# Altium PCB Main_Board.PcbDoc (part 4 of 14)
Units mm, origin at the board's own origin, x right, y up, seen from the top; angles counter-clockwise.
Board outline 142 x 82 mm, 10 copper layers (L1_Top, L2_PWR1, L3_Sig1, L4_GND1, L5_Sig2, L6_Sig3, L7_GND2, L8_Sig4, L9_GND3, L8_Bottom), stack 1.71 mm thick; 299 components, 328 nets, 2329 pads, 2908 vias.
Unrouted connection lines stored in the file: 2.
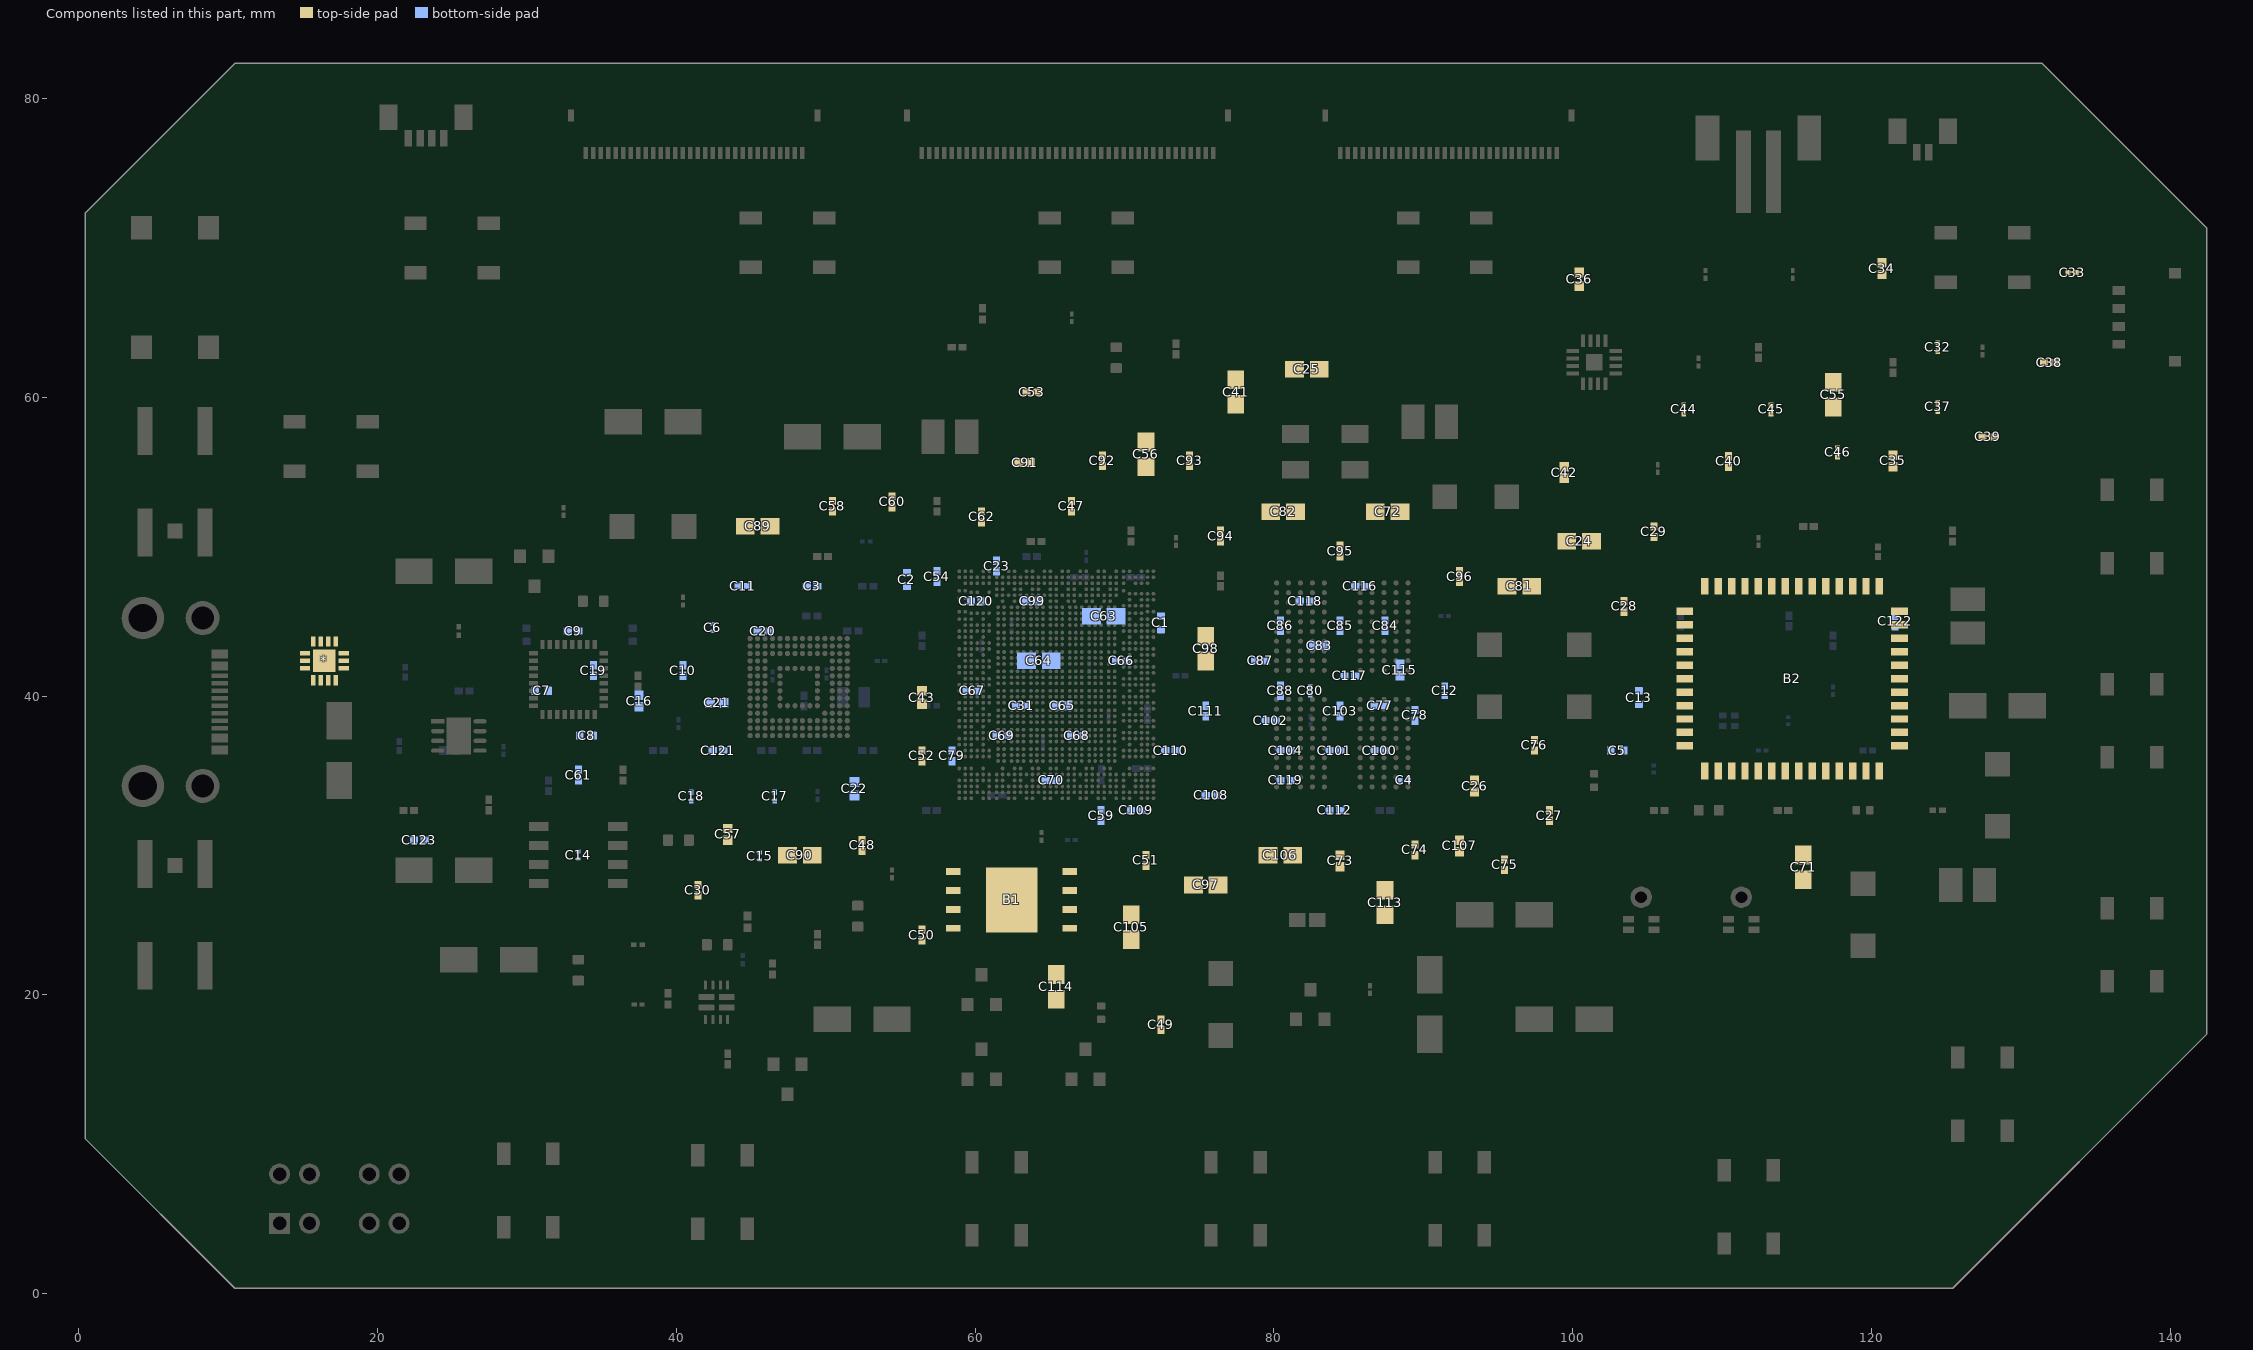
[diagram p12: the components of this part, seen from the top]

## Design rules (kind name [scope] priority, off if disabled: settings) (continued)
Clearance Clearance_2 [InNetClass('WIFI_BT_SIGNAL') And (ExistsOnLayer('L1_Top') Or ExistsOnLayer('L8_Bottom')) vs InNetClass('EMMC_HIGH_SPEED') And (ExistsOnLayer('L1_Top') Or ExistsOnLayer('L8_Bottom'))] p375: gap=0.02 ignorepadtopadclearanceinfootprint=FALSE except(0.254: Hole-Hole) sourcerule=512 cellrowname=WIFI_BT_SIGNAL cellrowtype=2 cellcolname=EMMC_HIGH_SPEED cellcoltype=2 outerlayers=TRUE
Clearance Clearance_3 [InNetClass('WIFI_BT_SIGNAL') vs InNetClass('EMMC_HIGH_SPEED')] p376: gap=0.254 ignorepadtopadclearanceinfootprint=FALSE sourcerule=512 cellrowname=WIFI_BT_SIGNAL cellrowtype=2 cellcolname=EMMC_HIGH_SPEED cellcoltype=2
Clearance Clearance_1 [InNetClass('WIFI_BT_SIGNAL') And (ExistsOnLayer('L3_Sig1') Or ExistsOnLayer('L5_Sig2') Or ExistsOnLayer('L6_Sig3') Or ExistsOnLayer('L8_Sig4')) vs InNetClass('I2S_PROTOCOL') And (ExistsOnLayer('L3_Sig1') Or ExistsOnLayer('L5_Sig2') Or ExistsOnLayer('L6_Sig3') Or ExistsOnLayer('L8_Sig4'))] p377: gap=0.02 ignorepadtopadclearanceinfootprint=FALSE except(0.254: Hole-Hole) sourcerule=512 cellrowname=WIFI_BT_SIGNAL cellrowtype=2 cellcolname=I2S_PROTOCOL cellcoltype=2 innerlayers=TRUE
Clearance Clearance_2 [InNetClass('WIFI_BT_SIGNAL') And (ExistsOnLayer('L1_Top') Or ExistsOnLayer('L8_Bottom')) vs InNetClass('I2S_PROTOCOL') And (ExistsOnLayer('L1_Top') Or ExistsOnLayer('L8_Bottom'))] p378: gap=0.02 ignorepadtopadclearanceinfootprint=FALSE except(0.254: Hole-Hole) sourcerule=512 cellrowname=WIFI_BT_SIGNAL cellrowtype=2 cellcolname=I2S_PROTOCOL cellcoltype=2 outerlayers=TRUE
Clearance Clearance_3 [InNetClass('WIFI_BT_SIGNAL') vs InNetClass('I2S_PROTOCOL')] p379: gap=0.254 ignorepadtopadclearanceinfootprint=FALSE sourcerule=512 cellrowname=WIFI_BT_SIGNAL cellrowtype=2 cellcolname=I2S_PROTOCOL cellcoltype=2
Clearance Clearance_1 [InNetClass('WIFI_BT_SIGNAL') And (ExistsOnLayer('L3_Sig1') Or ExistsOnLayer('L5_Sig2') Or ExistsOnLayer('L6_Sig3') Or ExistsOnLayer('L8_Sig4')) vs InNetClass('MCU_SIGNAL') And (ExistsOnLayer('L3_Sig1') Or ExistsOnLayer('L5_Sig2') Or ExistsOnLayer('L6_Sig3') Or ExistsOnLayer('L8_Sig4'))] p380: gap=0.02 ignorepadtopadclearanceinfootprint=FALSE except(0.254: Hole-Hole) sourcerule=512 cellrowname=WIFI_BT_SIGNAL cellrowtype=2 cellcolname=MCU_SIGNAL cellcoltype=2 innerlayers=TRUE
Clearance Clearance_2 [InNetClass('WIFI_BT_SIGNAL') And (ExistsOnLayer('L1_Top') Or ExistsOnLayer('L8_Bottom')) vs InNetClass('MCU_SIGNAL') And (ExistsOnLayer('L1_Top') Or ExistsOnLayer('L8_Bottom'))] p381: gap=0.02 ignorepadtopadclearanceinfootprint=FALSE except(0.254: Hole-Hole) sourcerule=512 cellrowname=WIFI_BT_SIGNAL cellrowtype=2 cellcolname=MCU_SIGNAL cellcoltype=2 outerlayers=TRUE
Clearance Clearance_3 [InNetClass('WIFI_BT_SIGNAL') vs InNetClass('MCU_SIGNAL')] p382: gap=0.254 ignorepadtopadclearanceinfootprint=FALSE sourcerule=512 cellrowname=WIFI_BT_SIGNAL cellrowtype=2 cellcolname=MCU_SIGNAL cellcoltype=2
Clearance Clearance_1 [InNetClass('WIFI_BT_SIGNAL') And (ExistsOnLayer('L3_Sig1') Or ExistsOnLayer('L5_Sig2') Or ExistsOnLayer('L6_Sig3') Or ExistsOnLayer('L8_Sig4')) vs InNetClass('MIPI_HIGH_SPEED') And (ExistsOnLayer('L3_Sig1') Or ExistsOnLayer('L5_Sig2') Or ExistsOnLayer('L6_Sig3') Or ExistsOnLayer('L8_Sig4'))] p383: gap=0.02 ignorepadtopadclearanceinfootprint=FALSE except(0.254: Hole-Hole) sourcerule=512 cellrowname=WIFI_BT_SIGNAL cellrowtype=2 cellcolname=MIPI_HIGH_SPEED cellcoltype=2 innerlayers=TRUE
Clearance Clearance_2 [InNetClass('WIFI_BT_SIGNAL') And (ExistsOnLayer('L1_Top') Or ExistsOnLayer('L8_Bottom')) vs InNetClass('MIPI_HIGH_SPEED') And (ExistsOnLayer('L1_Top') Or ExistsOnLayer('L8_Bottom'))] p384: gap=0.02 ignorepadtopadclearanceinfootprint=FALSE except(0.254: Hole-Hole) sourcerule=512 cellrowname=WIFI_BT_SIGNAL cellrowtype=2 cellcolname=MIPI_HIGH_SPEED cellcoltype=2 outerlayers=TRUE
Clearance Clearance_3 [InNetClass('WIFI_BT_SIGNAL') vs InNetClass('MIPI_HIGH_SPEED')] p385: gap=0.254 ignorepadtopadclearanceinfootprint=FALSE sourcerule=512 cellrowname=WIFI_BT_SIGNAL cellrowtype=2 cellcolname=MIPI_HIGH_SPEED cellcoltype=2
Clearance Clearance_1 [InNetClass('WIFI_BT_SIGNAL') And (ExistsOnLayer('L3_Sig1') Or ExistsOnLayer('L5_Sig2') Or ExistsOnLayer('L6_Sig3') Or ExistsOnLayer('L8_Sig4')) vs InNetClass('PERIPHERICS_SIGNALS') And (ExistsOnLayer('L3_Sig1') Or ExistsOnLayer('L5_Sig2') Or ExistsOnLayer('L6_Sig3') Or ExistsOnLayer('L8_Sig4'))] p386: gap=0.02 ignorepadtopadclearanceinfootprint=FALSE except(0.254: Hole-Hole) sourcerule=512 cellrowname=WIFI_BT_SIGNAL cellrowtype=2 cellcolname=PERIPHERICS_SIGNALS cellcoltype=2 innerlayers=TRUE
Clearance Clearance_2 [InNetClass('WIFI_BT_SIGNAL') And (ExistsOnLayer('L1_Top') Or ExistsOnLayer('L8_Bottom')) vs InNetClass('PERIPHERICS_SIGNALS') And (ExistsOnLayer('L1_Top') Or ExistsOnLayer('L8_Bottom'))] p387: gap=0.02 ignorepadtopadclearanceinfootprint=FALSE except(0.254: Hole-Hole) sourcerule=512 cellrowname=WIFI_BT_SIGNAL cellrowtype=2 cellcolname=PERIPHERICS_SIGNALS cellcoltype=2 outerlayers=TRUE
Clearance Clearance_3 [InNetClass('WIFI_BT_SIGNAL') vs InNetClass('PERIPHERICS_SIGNALS')] p388: gap=0.254 ignorepadtopadclearanceinfootprint=FALSE sourcerule=512 cellrowname=WIFI_BT_SIGNAL cellrowtype=2 cellcolname=PERIPHERICS_SIGNALS cellcoltype=2
Clearance Clearance_1 [InNetClass('WIFI_BT_SIGNAL') And (ExistsOnLayer('L3_Sig1') Or ExistsOnLayer('L5_Sig2') Or ExistsOnLayer('L6_Sig3') Or ExistsOnLayer('L8_Sig4')) vs InNetClass('POWER_SIGNALS') And (ExistsOnLayer('L3_Sig1') Or ExistsOnLayer('L5_Sig2') Or ExistsOnLayer('L6_Sig3') Or ExistsOnLayer('L8_Sig4'))] p389: gap=0.02 ignorepadtopadclearanceinfootprint=FALSE except(0.254: Hole-Hole) sourcerule=512 cellrowname=WIFI_BT_SIGNAL cellrowtype=2 cellcolname=POWER_SIGNALS cellcoltype=2 innerlayers=TRUE
Clearance Clearance_2 [InNetClass('WIFI_BT_SIGNAL') And (ExistsOnLayer('L1_Top') Or ExistsOnLayer('L8_Bottom')) vs InNetClass('POWER_SIGNALS') And (ExistsOnLayer('L1_Top') Or ExistsOnLayer('L8_Bottom'))] p390: gap=0.02 ignorepadtopadclearanceinfootprint=FALSE except(0.254: Hole-Hole) sourcerule=512 cellrowname=WIFI_BT_SIGNAL cellrowtype=2 cellcolname=POWER_SIGNALS cellcoltype=2 outerlayers=TRUE
Clearance Clearance_3 [InNetClass('WIFI_BT_SIGNAL') vs InNetClass('POWER_SIGNALS')] p391: gap=0.254 ignorepadtopadclearanceinfootprint=FALSE sourcerule=512 cellrowname=WIFI_BT_SIGNAL cellrowtype=2 cellcolname=POWER_SIGNALS cellcoltype=2
Clearance Clearance_1 [InNetClass('WIFI_BT_SIGNAL') And (ExistsOnLayer('L3_Sig1') Or ExistsOnLayer('L5_Sig2') Or ExistsOnLayer('L6_Sig3') Or ExistsOnLayer('L8_Sig4')) vs InNetClass('POWER_SUPPLY') And (ExistsOnLayer('L3_Sig1') Or ExistsOnLayer('L5_Sig2') Or ExistsOnLayer('L6_Sig3') Or ExistsOnLayer('L8_Sig4'))] p392: gap=0.02 ignorepadtopadclearanceinfootprint=FALSE except(0.254: Hole-Hole) sourcerule=512 cellrowname=WIFI_BT_SIGNAL cellrowtype=2 cellcolname=POWER_SUPPLY cellcoltype=2 innerlayers=TRUE
Clearance Clearance_2 [InNetClass('WIFI_BT_SIGNAL') And (ExistsOnLayer('L1_Top') Or ExistsOnLayer('L8_Bottom')) vs InNetClass('POWER_SUPPLY') And (ExistsOnLayer('L1_Top') Or ExistsOnLayer('L8_Bottom'))] p393: gap=0.02 ignorepadtopadclearanceinfootprint=FALSE except(0.254: Hole-Hole) sourcerule=512 cellrowname=WIFI_BT_SIGNAL cellrowtype=2 cellcolname=POWER_SUPPLY cellcoltype=2 outerlayers=TRUE
Clearance Clearance_3 [InNetClass('WIFI_BT_SIGNAL') vs InNetClass('POWER_SUPPLY')] p394: gap=0.254 ignorepadtopadclearanceinfootprint=FALSE sourcerule=512 cellrowname=WIFI_BT_SIGNAL cellrowtype=2 cellcolname=POWER_SUPPLY cellcoltype=2
Clearance Clearance_1 [InNetClass('WIFI_BT_SIGNAL') And (ExistsOnLayer('L3_Sig1') Or ExistsOnLayer('L5_Sig2') Or ExistsOnLayer('L6_Sig3') Or ExistsOnLayer('L8_Sig4')) vs InNetClass('PULL_DOWN_UP_RESISTENCE') And (ExistsOnLayer('L3_Sig1') Or ExistsOnLayer('L5_Sig2') Or ExistsOnLayer('L6_Sig3') Or ExistsOnLayer('L8_Sig4'))] p395: gap=0.02 ignorepadtopadclearanceinfootprint=FALSE except(0.254: Hole-Hole) sourcerule=512 cellrowname=WIFI_BT_SIGNAL cellrowtype=2 cellcolname=PULL_DOWN_UP_RESISTENCE cellcoltype=2 innerlayers=TRUE
Clearance Clearance_2 [InNetClass('WIFI_BT_SIGNAL') And (ExistsOnLayer('L1_Top') Or ExistsOnLayer('L8_Bottom')) vs InNetClass('PULL_DOWN_UP_RESISTENCE') And (ExistsOnLayer('L1_Top') Or ExistsOnLayer('L8_Bottom'))] p396: gap=0.02 ignorepadtopadclearanceinfootprint=FALSE except(0.254: Hole-Hole) sourcerule=512 cellrowname=WIFI_BT_SIGNAL cellrowtype=2 cellcolname=PULL_DOWN_UP_RESISTENCE cellcoltype=2 outerlayers=TRUE
Clearance Clearance_3 [InNetClass('WIFI_BT_SIGNAL') vs InNetClass('PULL_DOWN_UP_RESISTENCE')] p397: gap=0.254 ignorepadtopadclearanceinfootprint=FALSE sourcerule=512 cellrowname=WIFI_BT_SIGNAL cellrowtype=2 cellcolname=PULL_DOWN_UP_RESISTENCE cellcoltype=2
Clearance Clearance_1 [InNetClass('WIFI_BT_SIGNAL') And (ExistsOnLayer('L3_Sig1') Or ExistsOnLayer('L5_Sig2') Or ExistsOnLayer('L6_Sig3') Or ExistsOnLayer('L8_Sig4')) vs InNetClass('TYPEC_SIGNALS') And (ExistsOnLayer('L3_Sig1') Or ExistsOnLayer('L5_Sig2') Or ExistsOnLayer('L6_Sig3') Or ExistsOnLayer('L8_Sig4'))] p398: gap=0.02 ignorepadtopadclearanceinfootprint=FALSE except(0.254: Hole-Hole) sourcerule=512 cellrowname=WIFI_BT_SIGNAL cellrowtype=2 cellcolname=TYPEC_SIGNALS cellcoltype=2 innerlayers=TRUE
Clearance Clearance_2 [InNetClass('WIFI_BT_SIGNAL') And (ExistsOnLayer('L1_Top') Or ExistsOnLayer('L8_Bottom')) vs InNetClass('TYPEC_SIGNALS') And (ExistsOnLayer('L1_Top') Or ExistsOnLayer('L8_Bottom'))] p399: gap=0.02 ignorepadtopadclearanceinfootprint=FALSE except(0.254: Hole-Hole) sourcerule=512 cellrowname=WIFI_BT_SIGNAL cellrowtype=2 cellcolname=TYPEC_SIGNALS cellcoltype=2 outerlayers=TRUE
Clearance Clearance_3 [InNetClass('WIFI_BT_SIGNAL') vs InNetClass('TYPEC_SIGNALS')] p400: gap=0.254 ignorepadtopadclearanceinfootprint=FALSE sourcerule=512 cellrowname=WIFI_BT_SIGNAL cellrowtype=2 cellcolname=TYPEC_SIGNALS cellcoltype=2
Clearance Clearance_1 [InNetClass('WIFI_BT_SIGNAL') And (ExistsOnLayer('L3_Sig1') Or ExistsOnLayer('L5_Sig2') Or ExistsOnLayer('L6_Sig3') Or ExistsOnLayer('L8_Sig4')) vs InNetClass('UNCLASIFICATE_LOW_SPEED_SIGNALS') And (ExistsOnLayer('L3_Sig1') Or ExistsOnLayer('L5_Sig2') Or ExistsOnLayer('L6_Sig3') Or ExistsOnLayer('L8_Sig4'))] p401: gap=0.02 ignorepadtopadclearanceinfootprint=FALSE except(0.254: Hole-Hole) sourcerule=512 cellrowname=WIFI_BT_SIGNAL cellrowtype=2 cellcolname=UNCLASIFICATE_LOW_SPEED_SIGNALS cellcoltype=2 innerlayers=TRUE
Clearance Clearance_2 [InNetClass('WIFI_BT_SIGNAL') And (ExistsOnLayer('L1_Top') Or ExistsOnLayer('L8_Bottom')) vs InNetClass('UNCLASIFICATE_LOW_SPEED_SIGNALS') And (ExistsOnLayer('L1_Top') Or ExistsOnLayer('L8_Bottom'))] p402: gap=0.02 ignorepadtopadclearanceinfootprint=FALSE except(0.254: Hole-Hole) sourcerule=512 cellrowname=WIFI_BT_SIGNAL cellrowtype=2 cellcolname=UNCLASIFICATE_LOW_SPEED_SIGNALS cellcoltype=2 outerlayers=TRUE
Clearance Clearance_3 [InNetClass('WIFI_BT_SIGNAL') vs InNetClass('UNCLASIFICATE_LOW_SPEED_SIGNALS')] p403: gap=0.254 ignorepadtopadclearanceinfootprint=FALSE sourcerule=512 cellrowname=WIFI_BT_SIGNAL cellrowtype=2 cellcolname=UNCLASIFICATE_LOW_SPEED_SIGNALS cellcoltype=2
Clearance Clearance_1 [InNetClass('WIFI_BT_SIGNAL') And (ExistsOnLayer('L3_Sig1') Or ExistsOnLayer('L5_Sig2') Or ExistsOnLayer('L6_Sig3') Or ExistsOnLayer('L8_Sig4')) vs InNetClass('WIFI_BT_SIGNAL') And (ExistsOnLayer('L3_Sig1') Or ExistsOnLayer('L5_Sig2') Or ExistsOnLayer('L6_Sig3') Or ExistsOnLayer('L8_Sig4'))] p404: gap=0.02 ignorepadtopadclearanceinfootprint=FALSE except(0.254: Hole-Hole) sourcerule=512 cellrowname=WIFI_BT_SIGNAL cellrowtype=2 cellcolname=WIFI_BT_SIGNAL cellcoltype=2 innerlayers=TRUE
Clearance Clearance_2 [InNetClass('WIFI_BT_SIGNAL') And (ExistsOnLayer('L1_Top') Or ExistsOnLayer('L8_Bottom')) vs InNetClass('WIFI_BT_SIGNAL') And (ExistsOnLayer('L1_Top') Or ExistsOnLayer('L8_Bottom'))] p405: gap=0.02 ignorepadtopadclearanceinfootprint=FALSE except(0.254: Hole-Hole) sourcerule=512 cellrowname=WIFI_BT_SIGNAL cellrowtype=2 cellcolname=WIFI_BT_SIGNAL cellcoltype=2 outerlayers=TRUE
Clearance Clearance_3 [InNetClass('WIFI_BT_SIGNAL') vs InNetClass('WIFI_BT_SIGNAL')] p406: gap=0.254 ignorepadtopadclearanceinfootprint=FALSE sourcerule=512 cellrowname=WIFI_BT_SIGNAL cellrowtype=2 cellcolname=WIFI_BT_SIGNAL cellcoltype=2
Clearance Clearance_1 [(ExistsOnLayer('L3_Sig1') Or ExistsOnLayer('L5_Sig2') Or ExistsOnLayer('L6_Sig3') Or ExistsOnLayer('L8_Sig4')) vs (ExistsOnLayer('L3_Sig1') Or ExistsOnLayer('L5_Sig2') Or ExistsOnLayer('L6_Sig3') Or ExistsOnLayer('L8_Sig4'))] p407: gap=0.02 ignorepadtopadclearanceinfootprint=FALSE except(0.01: Hole-Hole) sourcerule=512 cellrowname=All cellrowtype=0 cellcolname=All cellcoltype=0 innerlayers=TRUE
Clearance Clearance_2 [(ExistsOnLayer('L1_Top') Or ExistsOnLayer('L8_Bottom')) vs (ExistsOnLayer('L1_Top') Or ExistsOnLayer('L8_Bottom'))] p408: gap=0.02 ignorepadtopadclearanceinfootprint=FALSE except(0.01: Hole-Hole) sourcerule=512 cellrowname=All cellrowtype=0 cellcolname=All cellcoltype=0 outerlayers=TRUE
Clearance [All] p409: gap=0.254 ignorepadtopadclearanceinfootprint=FALSE ismatrix=TRUE miname0=PULL_DOWN_UP_RESISTENCE mitype0=2 miname1=ANTENAS mitype1=2 miname2=MIPI_HIGH_SPEED mitype2=2 miname3=WIFI_BT_SIGNAL mitype3=2 miname4=POWER_SUPPLY mitype4=2 miname5=PERIPHERICS_SIGNALS mitype5=2 miname6=I2S_PROTOCOL mitype6=2 miname7=DDR1_HIGH_SPEED mitype7=2 miname8=MCU_SIGNAL mitype8=2 miname9=TYPEC_SIGNALS mitype9=2 miname10=CPU_SIGNAL mitype10=2 miname11=CSI_HIGH_SPEED mitype11=2 miname12=UNCLASIFICATE_LOW_SPEED_SIGNALS mitype12=2 miname13=EMMC_HIGH_SPEED mitype13=2 miname14=POWER_SIGNALS mitype14=2
ComponentClearance [All] p1: isadvanced=TRUE gap=0.254 collisioncheckmode=3 verticalgap=0.254 showdistances=FALSE
DiffPairsRouting "Schematic Differential Pairs Routing_2" [InDifferentialPair('D_DDR1_DQS0')] p1: maxlimit=0.254 minlimit=0.089 mostfreqgap=0.254 toplayer_maxgap=0.089 toplayer_prefgap=0.089 toplayer_minwidth=0.089 toplayer_maxwidth=0.102 toplayer_prefwidth=0.102 midlayer1_mingap=0.254 midlayer1_minwidth=0.381 midlayer1_maxwidth=0.381 midlayer1_prefwidth=0.381 midlayer2_mingap=0.254 midlayer2_minwidth=0.381 midlayer2_maxwidth=0.381 midlayer2_prefwidth=0.381 midlayer3_mingap=0.254 midlayer3_minwidth=0.381 midlayer3_maxwidth=0.381 midlayer3_prefwidth=0.381 midlayer4_mingap=0.254 midlayer4_minwidth=0.381 midlayer4_maxwidth=0.381 midlayer4_prefwidth=0.381 bottomlayer_maxgap=0.089 bottomlayer_prefgap=0.089 bottomlayer_minwidth=0.089 bottomlayer_maxwidth=0.102 bottomlayer_prefwidth=0.102 maxuncoupledlength=12.7
DiffPairsRouting "Schematic Differential Pairs Routing_3" [InDifferentialPairClass('DDR1')] p2: maxlimit=0.254 minlimit=0.089 mostfreqgap=0.254 toplayer_maxgap=0.089 toplayer_prefgap=0.089 toplayer_minwidth=0.089 toplayer_maxwidth=0.102 toplayer_prefwidth=0.102 midlayer1_mingap=0.254 midlayer1_minwidth=0.381 midlayer1_maxwidth=0.381 midlayer1_prefwidth=0.381 midlayer2_mingap=0.254 midlayer2_minwidth=0.381 midlayer2_maxwidth=0.381 midlayer2_prefwidth=0.381 midlayer3_mingap=0.254 midlayer3_minwidth=0.381 midlayer3_maxwidth=0.381 midlayer3_prefwidth=0.381 midlayer4_mingap=0.254 midlayer4_minwidth=0.381 midlayer4_maxwidth=0.381 midlayer4_prefwidth=0.381 bottomlayer_maxgap=0.089 bottomlayer_prefgap=0.089 bottomlayer_minwidth=0.089 bottomlayer_maxwidth=0.102 bottomlayer_prefwidth=0.102 maxuncoupledlength=12.7
DiffPairsRouting "Schematic Differential Pairs Routing_1" [InDifferentialPairClass('CSI')] p3: maxlimit=0.254 minlimit=0.089 mostfreqgap=0.254 toplayer_maxgap=0.089 toplayer_prefgap=0.089 toplayer_minwidth=0.089 toplayer_maxwidth=0.102 toplayer_prefwidth=0.102 midlayer1_mingap=0.254 midlayer1_minwidth=0.381 midlayer1_maxwidth=0.381 midlayer1_prefwidth=0.381 midlayer2_mingap=0.254 midlayer2_minwidth=0.381 midlayer2_maxwidth=0.381 midlayer2_prefwidth=0.381 midlayer3_mingap=0.254 midlayer3_minwidth=0.381 midlayer3_maxwidth=0.381 midlayer3_prefwidth=0.381 midlayer4_mingap=0.254 midlayer4_minwidth=0.381 midlayer4_maxwidth=0.381 midlayer4_prefwidth=0.381 bottomlayer_maxgap=0.089 bottomlayer_prefgap=0.089 bottomlayer_minwidth=0.089 bottomlayer_maxwidth=0.102 bottomlayer_prefwidth=0.102 maxuncoupledlength=12.7
DiffPairsRouting "Schematic Differential Pairs Routing" [InDifferentialPairClass('MIPI')] p4: maxlimit=0.254 minlimit=0.089 mostfreqgap=0.254 toplayer_maxgap=0.089 toplayer_prefgap=0.089 toplayer_minwidth=0.089 toplayer_maxwidth=0.102 toplayer_prefwidth=0.102 midlayer1_mingap=0.254 midlayer1_minwidth=0.381 midlayer1_maxwidth=0.381 midlayer1_prefwidth=0.381 midlayer2_mingap=0.254 midlayer2_minwidth=0.381 midlayer2_maxwidth=0.381 midlayer2_prefwidth=0.381 midlayer3_mingap=0.254 midlayer3_minwidth=0.381 midlayer3_maxwidth=0.381 midlayer3_prefwidth=0.381 midlayer4_mingap=0.254 midlayer4_minwidth=0.381 midlayer4_maxwidth=0.381 midlayer4_prefwidth=0.381 bottomlayer_maxgap=0.089 bottomlayer_prefgap=0.089 bottomlayer_minwidth=0.089 bottomlayer_maxwidth=0.102 bottomlayer_prefwidth=0.102 maxuncoupledlength=12.7
DiffPairsRouting DifferentialPairsRouting_1 [InDifferentialPairClass('All Differential Pairs')] p5: maxlimit=0.254 minlimit=0.01 mostfreqgap=0.254 toplayer_maxgap=0.01 toplayer_prefgap=0.01 toplayer_minwidth=0.381 toplayer_maxwidth=0.381 toplayer_prefwidth=0.381 midlayer1_maxgap=0.01 midlayer1_prefgap=0.01 midlayer1_minwidth=0.381 midlayer1_maxwidth=0.381 midlayer1_prefwidth=0.381 midlayer2_mingap=0.254 midlayer2_minwidth=0.381 midlayer2_maxwidth=0.381 midlayer2_prefwidth=0.381 midlayer3_mingap=0.254 midlayer3_minwidth=0.381 midlayer3_maxwidth=0.381 midlayer3_prefwidth=0.381 midlayer4_maxgap=0.01 midlayer4_prefgap=0.01 midlayer4_minwidth=0.381 midlayer4_maxwidth=0.381 midlayer4_prefwidth=0.381 bottomlayer_maxgap=0.01 bottomlayer_prefgap=0.01 bottomlayer_minwidth=0.381 bottomlayer_maxwidth=0.381 bottomlayer_prefwidth=0.381 maxuncoupledlength=12.7
DiffPairsRouting [All] p6: maxlimit=0.254 minlimit=0.01 mostfreqgap=0.254 toplayer_maxgap=0.01 toplayer_prefgap=0.01 toplayer_minwidth=0.381 toplayer_maxwidth=0.381 toplayer_prefwidth=0.381 midlayer1_maxgap=0.01 midlayer1_prefgap=0.01 midlayer1_minwidth=0.381 midlayer1_maxwidth=0.381 midlayer1_prefwidth=0.381 midlayer2_mingap=0.254 midlayer2_minwidth=0.381 midlayer2_maxwidth=0.381 midlayer2_prefwidth=0.381 midlayer3_mingap=0.254 midlayer3_minwidth=0.381 midlayer3_maxwidth=0.381 midlayer3_prefwidth=0.381 midlayer4_maxgap=0.01 midlayer4_prefgap=0.01 midlayer4_minwidth=0.381 midlayer4_maxwidth=0.381 midlayer4_prefwidth=0.381 bottomlayer_maxgap=0.01 bottomlayer_prefgap=0.01 bottomlayer_minwidth=0.381 bottomlayer_maxwidth=0.381 bottomlayer_prefwidth=0.381 maxuncoupledlength=12.7
FabricationTestPointUsage [All] p1: isadvanced=TRUE valid=0 allowmultiple=FALSE
FabricationTestpoint [All] p1: isadvanced=TRUE side=3 testpointundercomponent=TRUE minsize=1.016 maxsize=2.54 preferedsize=1.524 minholesize=0 maxholesize=1.016 preferedholesize=0.813 testpointgrid=0.025 allowsidetop=TRUE allowsidebottom=TRUE usegrid=TRUE gridtolerance=0
FanoutControl Fanout_BGA [IsBGA] p1: isadvanced=TRUE bgadir=Out bgaviamode=Centered fanoutstyle=Auto fanoutdirection=Alternating viagrid=0.025 // Fanout_BGA (Default Rule)
FanoutControl Fanout_LCC [IsLCC] p2: isadvanced=TRUE bgadir=Out bgaviamode=Centered fanoutstyle=Auto fanoutdirection=Alternating viagrid=0.025 // Fanout_LCC (Default Rule)
FanoutControl Fanout_SOIC [IsSOIC] p3: isadvanced=TRUE bgadir=Out bgaviamode=Centered fanoutstyle=Auto fanoutdirection=Alternating viagrid=0.025 // Fanout_SOIC (Default Rule)
FanoutControl Fanout_Small [(CompPinCount < 5)] p4: isadvanced=TRUE bgadir=Out bgaviamode=Centered fanoutstyle=Auto fanoutdirection=OutThenIn viagrid=0.025 // Fanout_Small (Default Rule)
FanoutControl Fanout_Default [All] p5: isadvanced=TRUE bgadir=Out bgaviamode=Centered fanoutstyle=Auto fanoutdirection=Alternating viagrid=0.025 // Fanout_Default (Default Rule)
Height [All] p1: isadvanced=TRUE minheight=0 maxheight=25.4 prefheight=12.7
HoleSize [All] p1: isadvanced=TRUE absolutevalues=TRUE maxlimit=2.54 minlimit=0.001 maxpercent=80.000 minpercent=20.000
HoleToHoleClearance [All] p1: isadvanced=TRUE gap=0.01 allowstackedmicrovias=TRUE
LayerPairs [All] p1: isadvanced=TRUE enforce=TRUE
Length "Schematic Length Constraint" [InNetClass('EMMC_HIGH_SPEED')] p1: maxlimit=38.1 minlimit=0
MatchedLengths "Schematic Matched Net Lengths_2" [InDifferentialPairClass('CSI')] p1: tolerance=1.27 checknetsindiffpair=TRUE checkdiffpairvsdiffpair=FALSE checkxsignals=FALSE checkothers=FALSE
MatchedLengths "Schematic Matched Net Lengths_1" [InDifferentialPairClass('MIPI')] p2: tolerance=1.27 checknetsindiffpair=TRUE checkdiffpairvsdiffpair=FALSE checkxsignals=FALSE checkothers=FALSE
MatchedLengths "Schematic Matched Net Lengths" [InDifferentialPairClass('DDR1')] p3: tolerance=1.27 checknetsindiffpair=TRUE checkdiffpairvsdiffpair=FALSE checkxsignals=FALSE checkothers=FALSE
MaxMinImpedance "Schematic Impedance Constraint" [InNetClass('EMMC_HIGH_SPEED')] p1: minimum=45.00 maximum=55.00
MaxMinImpedance "Schematic Impedance Constraint_9" [InNetClass('MIPI_HIGH_SPEED')] p2: minimum=90.00 maximum=110.0
MaxMinImpedance "Schematic Impedance Constraint_8" [InNetClass('CSI_HIGH_SPEED')] p3: minimum=90.00 maximum=110.0
MaxMinImpedance "Schematic Impedance Constraint_6" [InNetClass('DDR1_HIGH_SPEED')] p4: minimum=90.00 maximum=110.0
MaxMinImpedance "Schematic Impedance Constraint_3" [InNetClass('TYPEC_SIGNALS')] p5: minimum=85.00 maximum=95.00
MaxMinImpedance "Schematic Impedance Constraint_2" [InNetClass('WIFI_BT_SIGNAL')] p6: minimum=48.00 maximum=52.00
MaxMinImpedance "Schematic Impedance Constraint_1" [InNetClass('ANTENAS')] p7: minimum=48.00 maximum=52.00
MaxMinImpedance "Schematic Impedance Constraint_7" [InDifferentialPair('D_DDR1_DQS0')] p8: minimum=90.00 maximum=110.0
MaxMinImpedance "Schematic Impedance Constraint_10" [InDifferentialPairClass('CSI')] p9: minimum=90.00 maximum=110.0
MaxMinImpedance "Schematic Impedance Constraint_4" [InDifferentialPairClass('MIPI')] p10: minimum=90.00 maximum=110.0
MaxMinImpedance "Schematic Impedance Constraint_5" [InDifferentialPairClass('DDR1')] p11: minimum=90.00 maximum=110.0
MaximumViaCount "Schematic Maximum Via Count Constraint_14" [InNetClass('POWER_SUPPLY')] p1: limit=30
MaximumViaCount "Schematic Maximum Via Count Constraint_6" [InNetClass('EMMC_HIGH_SPEED')] p2: limit=4
MaximumViaCount "Schematic Maximum Via Count Constraint_2" [InNetClass('MIPI_HIGH_SPEED')] p3: limit=2
MaximumViaCount "Schematic Maximum Via Count Constraint_5" [InNetClass('CSI_HIGH_SPEED')] p4: limit=2
MaximumViaCount "Schematic Maximum Via Count Constraint_3" [InNetClass('DDR1_HIGH_SPEED')] p5: limit=2
MaximumViaCount "Schematic Maximum Via Count Constraint_4" [InNetClass('TYPEC_SIGNALS')] p6: limit=2
MaximumViaCount "Schematic Maximum Via Count Constraint_1" [InNetClass('WIFI_BT_SIGNAL')] p7: limit=2
MaximumViaCount "Schematic Maximum Via Count Constraint" [InNetClass('ANTENAS')] p8: limit=0
MaximumViaCount "Schematic Maximum Via Count Constraint_13" [InNetClass('PULL_DOWN_UP_RESISTENCE')] p9: limit=20
MaximumViaCount "Schematic Maximum Via Count Constraint_12" [InNetClass('UNCLASIFICATE_LOW_SPEED_SIGNALS')] p10: limit=20
MaximumViaCount "Schematic Maximum Via Count Constraint_11" [InNetClass('POWER_SIGNALS')] p11: limit=15
MaximumViaCount "Schematic Maximum Via Count Constraint_10" [InNetClass('PERIPHERICS_SIGNALS')] p12: limit=12
MaximumViaCount "Schematic Maximum Via Count Constraint_9" [InNetClass('I2S_PROTOCOL')] p13: limit=10
MaximumViaCount "Schematic Maximum Via Count Constraint_8" [InNetClass('MCU_SIGNAL')] p14: limit=8
MaximumViaCount "Schematic Maximum Via Count Constraint_7" [InNetClass('CPU_SIGNAL')] p15: limit=8
MinimumSolderMaskSliver [All] p1: isadvanced=TRUE minsoldermaskwidth=0.01
NetAntennae [All] p1: isadvanced=TRUE netantennaetolerance=0
PasteMaskExpansion [All] p1: isadvanced=TRUE expansion=0
PlaneClearance [All] p1: isadvanced=TRUE clearance=0.01
PlaneConnect [All] p1: isadvanced=TRUE planeconnectstyle=Relief reliefexpansion=0.1 reliefentries=4 reliefconductorwidth=0.01 reliefairgap=0.1
PolygonConnect PolygonConnectStyle_1 [All] p1: isadvanced=TRUE connectstyle=Relief reliefconductorwidth=0.1 reliefentries=2 polygonreliefangle="0 Angle" airgapwidth=0.1
PolygonConnect "Schematic Polygon Connect Style_13" [InNetClass('POWER_SUPPLY')] p2: connectstyle=Relief reliefconductorwidth=0.508 reliefentries=4 polygonreliefangle="90 Angle" airgapwidth=0.203
PolygonConnect "Schematic Polygon Connect Style_14" [InNetClass('ANTENAS')] p3: connectstyle=Relief reliefconductorwidth=0.01 reliefentries=2 polygonreliefangle="90 Angle" airgapwidth=0.01
PolygonConnect "Schematic Polygon Connect Style_12" [InNetClass('POWER_SIGNALS')] p4: connectstyle=Relief reliefconductorwidth=0.203 reliefentries=4 polygonreliefangle="90 Angle" airgapwidth=0.127
PolygonConnect "Schematic Polygon Connect Style_10" [InNetClass('PULL_DOWN_UP_RESISTENCE')] p5: connectstyle=Relief reliefconductorwidth=0.152 reliefentries=4 polygonreliefangle="90 Angle" airgapwidth=0.127
PolygonConnect "Schematic Polygon Connect Style_11" [InNetClass('UNCLASIFICATE_LOW_SPEED_SIGNALS')] p6: connectstyle=Relief reliefconductorwidth=0.152 reliefentries=4 polygonreliefangle="90 Angle" airgapwidth=0.152
PolygonConnect "Schematic Polygon Connect Style_5" [InNetClass('PERIPHERICS_SIGNALS')] p7: connectstyle=Relief reliefconductorwidth=0.127 reliefentries=4 polygonreliefangle="90 Angle" airgapwidth=0.127
PolygonConnect "Schematic Polygon Connect Style_8" [InNetClass('MCU_SIGNAL')] p8: connectstyle=Relief reliefconductorwidth=0.127 reliefentries=4 polygonreliefangle="90 Angle" airgapwidth=0.127
PolygonConnect "Schematic Polygon Connect Style_9" [InNetClass('WIFI_BT_SIGNAL')] p9: connectstyle=Relief reliefconductorwidth=0.127 reliefentries=4 polygonreliefangle="90 Angle" airgapwidth=0.01
PolygonConnect "Schematic Polygon Connect Style_7" [InNetClass('I2S_PROTOCOL')] p10: connectstyle=Relief reliefconductorwidth=0.127 reliefentries=4 polygonreliefangle="90 Angle" airgapwidth=0.127
PolygonConnect "Schematic Polygon Connect Style_6" [InNetClass('CPU_SIGNAL')] p11: connectstyle=Relief reliefconductorwidth=0.127 reliefentries=4 polygonreliefangle="90 Angle" airgapwidth=0.127
PolygonConnect "Schematic Polygon Connect Style_3" [InNetClass('EMMC_HIGH_SPEED')] p12: connectstyle=Relief reliefconductorwidth=0.102 reliefentries=4 polygonreliefangle="90 Angle" airgapwidth=0.127
PolygonConnect "Schematic Polygon Connect Style_4" [InNetClass('CSI_HIGH_SPEED')] p13: connectstyle=Relief reliefconductorwidth=0.102 reliefentries=4 polygonreliefangle="90 Angle" airgapwidth=0.127
PolygonConnect "Schematic Polygon Connect Style_2" [InNetClass('MIPI_HIGH_SPEED')] p14: connectstyle=Relief reliefconductorwidth=0.102 reliefentries=4 polygonreliefangle="90 Angle" airgapwidth=0.127
PolygonConnect "Schematic Polygon Connect Style_1" [InNetClass('TYPEC_SIGNALS')] p15: connectstyle=Relief reliefconductorwidth=0.102 reliefentries=4 polygonreliefangle="90 Angle" airgapwidth=0.127
PolygonConnect "Schematic Polygon Connect Style" [InNetClass('DDR1_HIGH_SPEED')] p16: connectstyle=Relief reliefconductorwidth=0.102 reliefentries=4 polygonreliefangle="45 Angle" airgapwidth=0.127
PolygonConnect [All] p17: connectstyle=Relief reliefconductorwidth=0.01 reliefentries=4 polygonreliefangle="90 Angle" airgapwidth=0.01
RoutingCorners [All] p1: isadvanced=TRUE cornerstyle=45-Degree minsetback=2.54 maxsetback=2.54
RoutingPriority [All] p1: isadvanced=TRUE routingpriority=0
RoutingVias RoutingViaStyle_1 [All] p1: isadvanced=TRUE holewidth=0.08 width=0.1 viastyle="Through Hole" minholewidth=0.01 minwidth=0.01 maxholewidth=1 maxwidth=1
RoutingVias [All] p2: holewidth=0.04 width=0.05 viastyle="Through Hole" minholewidth=0.04 minwidth=0.05 maxholewidth=1 maxwidth=1
ShortCircuit [All] p1: isadvanced=TRUE allowed=FALSE
SilkToSilkClearance [All] p1: isadvanced=TRUE silktosilkclearance=0.254
SilkToSolderMaskClearance [IsPad] p1: isadvanced=TRUE minsilkscreentomaskgap=0.254 clearancetoexposedcopper=TRUE
SolderMaskExpansion [All] p1: isadvanced=TRUE expansion=0 istentingtop=FALSE
SupplyNets "Schematic Supply Nets" [InNet('GND')] p1: isadvanced=TRUE voltage=0.000
UnRoutedNet [All] p1: isadvanced=TRUE
UnpouredPolygon [All] p1: isadvanced=TRUE
Width "Schematic Width Constraint" [InNet('DDR1_CAA0')] p1: maxlimit=0.254 minlimit=0.089 preferedwidth=0.254 toplayer_maxwidth=0.102 toplayer_prefwidth=0.102 midlayer1_minwidth=0.254 midlayer2_minwidth=0.254 midlayer3_minwidth=0.254 midlayer4_minwidth=0.254 bottomlayer_maxwidth=0.102 bottomlayer_prefwidth=0.102 minimp=50.000000 maximp=50.000000 favimp=50.000000
Width "Schematic Width Constraint_15" [InNetClass('POWER_SUPPLY')] p2: maxlimit=2.54 minlimit=0.04 preferedwidth=0.254 toplayer_prefwidth=1.016 midlayer1_maxwidth=0.254 midlayer2_maxwidth=0.254 midlayer3_maxwidth=0.254 midlayer4_maxwidth=0.254 bottomlayer_prefwidth=1.016 minimp=50.000000 maximp=50.000000 favimp=50.000000
Width "Schematic Width Constraint_7" [InNetClass('ANTENAS')] p3: maxlimit=0.254 minlimit=0.04 preferedwidth=0.254 toplayer_maxwidth=0.203 toplayer_prefwidth=0.152 bottomlayer_maxwidth=0.203 bottomlayer_prefwidth=0.152 minimp=50.000000 maximp=50.000000 favimp=50.000000
Width "Schematic Width Constraint_14" [InNetClass('POWER_SIGNALS')] p4: maxlimit=0.381 minlimit=0.04 preferedwidth=0.1 midlayer1_maxwidth=0.254 midlayer2_maxwidth=0.254 midlayer3_maxwidth=0.254 midlayer4_maxwidth=0.254 minimp=50.000000 maximp=50.000000 favimp=50.000000
Width "Schematic Width Constraint_13" [InNetClass('PULL_DOWN_UP_RESISTENCE')] p5: maxlimit=0.305 minlimit=0.04 preferedwidth=0.254 toplayer_prefwidth=0.203 midlayer1_maxwidth=0.254 midlayer2_maxwidth=0.254 midlayer3_maxwidth=0.254 midlayer4_maxwidth=0.254 bottomlayer_prefwidth=0.203 minimp=50.000000 maximp=50.000000 favimp=50.000000
Width "Schematic Width Constraint_12" [InNetClass('UNCLASIFICATE_LOW_SPEED_SIGNALS')] p6: maxlimit=0.305 minlimit=0.04 preferedwidth=0.254 toplayer_prefwidth=0.203 midlayer1_maxwidth=0.254 midlayer2_maxwidth=0.254 midlayer3_maxwidth=0.254 midlayer4_maxwidth=0.254 bottomlayer_prefwidth=0.203 minimp=50.000000 maximp=50.000000 favimp=50.000000
Width "Schematic Width Constraint_11" [InNetClass('PERIPHERICS_SIGNALS')] p7: maxlimit=0.254 minlimit=0.04 preferedwidth=0.254 toplayer_prefwidth=0.203 bottomlayer_prefwidth=0.203 minimp=50.000000 maximp=50.000000 favimp=50.000000
Width "Schematic Width Constraint_10" [InNetClass('MCU_SIGNAL')] p8: maxlimit=0.254 minlimit=0.04 preferedwidth=0.254 toplayer_maxwidth=0.203 toplayer_prefwidth=0.152 bottomlayer_maxwidth=0.203 bottomlayer_prefwidth=0.152 minimp=50.000000 maximp=50.000000 favimp=50.000000
Width "Schematic Width Constraint_5" [InNetClass('WIFI_BT_SIGNAL')] p9: maxlimit=0.254 minlimit=0.04 preferedwidth=0.1 toplayer_maxwidth=0.127 bottomlayer_maxwidth=0.127 minimp=50.000000 maximp=50.000000 favimp=50.000000
Width "Schematic Width Constraint_9" [InNetClass('I2S_PROTOCOL')] p10: maxlimit=0.254 minlimit=0.04 preferedwidth=0.254 toplayer_maxwidth=0.203 toplayer_prefwidth=0.152 bottomlayer_maxwidth=0.203 bottomlayer_prefwidth=0.152 minimp=50.000000 maximp=50.000000 favimp=50.000000
Width "Schematic Width Constraint_8" [InNetClass('CPU_SIGNAL')] p11: maxlimit=0.254 minlimit=0.04 preferedwidth=0.254 toplayer_maxwidth=0.203 toplayer_prefwidth=0.152 bottomlayer_maxwidth=0.203 bottomlayer_prefwidth=0.152 minimp=50.000000 maximp=50.000000 favimp=50.000000
Width "Schematic Width Constraint_6" [InNetClass('EMMC_HIGH_SPEED')] p12: maxlimit=0.254 minlimit=0.04 preferedwidth=0.254 toplayer_maxwidth=0.127 toplayer_prefwidth=0.127 bottomlayer_maxwidth=0.127 bottomlayer_prefwidth=0.127 minimp=50.000000 maximp=50.000000 favimp=50.000000
Width "Schematic Width Constraint_1" [InNetClass('CSI_HIGH_SPEED')] p13: maxlimit=1 minlimit=0.04 preferedwidth=0.1 minimp=50.000000 maximp=50.000000 favimp=50.000000
Width "Schematic Width Constraint_4" [InNetClass('MIPI_HIGH_SPEED')] p14: maxlimit=0.254 minlimit=0.04 preferedwidth=0.254 toplayer_maxwidth=0.102 toplayer_prefwidth=0.102 bottomlayer_maxwidth=0.102 bottomlayer_prefwidth=0.102 minimp=50.000000 maximp=50.000000 favimp=50.000000
Width "Schematic Width Constraint_3" [InNetClass('TYPEC_SIGNALS')] p15: maxlimit=0.254 minlimit=0.04 preferedwidth=0.254 toplayer_maxwidth=0.102 toplayer_prefwidth=0.102 bottomlayer_maxwidth=0.102 bottomlayer_prefwidth=0.102 minimp=50.000000 maximp=50.000000 favimp=50.000000
Width "Schematic Width Constraint_2" [InNetClass('DDR1_HIGH_SPEED')] p16: maxlimit=0.254 minlimit=0.04 preferedwidth=0.1 toplayer_maxwidth=0.102 bottomlayer_maxwidth=0.102 minimp=50.000000 maximp=50.000000 favimp=50.000000
Width MaxMinWidth_1 [InxNetClass('All xNets')] p17: maxlimit=0.04 minlimit=0.04 preferedwidth=0.04 minimp=50.000000 maximp=50.000000 favimp=50.000000
Width [All] p18: maxlimit=0.254 minlimit=0.05 preferedwidth=0.254 minimp=50.000000 maximp=50.000000 favimp=50.000000
3 further rules are at their usual default settings.

## Classes and differential pairs
differential pair class MIPI: D_MIPI_DSI_CLK D_MIPI_DSI_D0 D_MIPI_DSI_D1 D_MIPI_DSI_D2 D_MIPI_DSI_D3
differential pair class DDR1: D_DDR1_DQS0 D_DDR1_DQS1 D_DDR1_DQS2 D_DDR1_DQS3
differential pair class CSI: D_CSI_A_CLK D_CSI_A_D0 D_CSI_A_D1 D_CSI_A_D2 D_CSI_A_D3 D_CSI_B_CLK
net class WIFI_BT_SIGNAL: BT_EN BT_WAKE_HOST BTPCM_CLK BTPCM_DIN BTPCM_DOUT BTPCM_SYNC BTUART_C_CTS_N BTUART_C_RTS_N BTUART_C_RX BTUART_C_TX WIFI_32K WIFI_PWREN WIFI_SD_CLK WIFI_SD_CMD WIFI_SD_D0 WIFI_SD_D1 WIFI_SD_D2 WIFI_SD_D3 WIFI_VBAT WIFI_WAKE_HOST
net class UNCLASIFICATE_LOW_SPEED_SIGNALS: Net*_6 Net*_7 NetB2_13 NetB2_14 NetB2_16 NetB2_25 NetB2_26 NetB2_28 NetB2_29 NetB2_31 NetB2_34 NetB2_49 NetB2_50 NetC9_1 NetC14_1 NetC15_1 NetC23_1 NetC40_1 NetC79_1 NetC121_1 NetC125_1 NetC127_1 NetC131_1 NetC133_1 NetC134_2 NetC137_1 NetD1_1 NetD2_2 NetD3_1 NetD5_1 NetD7_1 NetD7_2 NetJ6_2 NetJ8_1 NetJ8_2 NetL1_2 NetQ1_2 NetQ3_3 NetQ4_3 NetQ5_3 NetQ6_1 NetQ6_3 NetR1_1 NetR4_2 NetR6_2 NetR55_1 NetR63_2 NetR65_2 NetR66_1 NetR69_2 NetR73_2 NetR79_1 NetSW4_1 NetU1_A16 NetU8_2 NetU8_4 NetU9_4 NetU10_4 NetU13_2 NetU13_4 NetU17_2 NetU17_4 NetU19_2 NetU19_4 NetU21_2 NetU21_4 NetU23_2 NetU23_4 NetU25_4
net class TYPEC_SIGNALS: TYPEC_CC1 TYPEC_CC2 TYPEC_DM TYPEC_DP USB_B_OTG_DM USB_B_OTG_DP USBCC_INTn
net class PULL_DOWN_UP_RESISTENCE: PANEL_B_PWR PDM_DCLK PDM_DIN3 POR_OUT RGMII_CRS_DV RGMII_MDC RGMII_MDIO RGMII_RXCLK RTC_CLK RTC_INT SDIO_CLK SOC_PWR_KEY SPDIF_OUT SPIF_CS SPINOR_EN SYS_LED TP_I2CM_D_SCL TP_I2CM_D_SDA TP_INT TP_RST WD_RSTO WOL_EN WOL_INTB
net class POWER_SUPPLY: DCIN DCIN_TYPE-C DCIN_USBC DCIN_VIN DMIC_VDD DRAM1_VDD1_1V8 DRAM_VDD1_1V8 VCC5V VCC5V_EN VCC_MCU VDD_DDR VDD_EE VDD_GPU VDD_NPU VDDAO_1V8 VDDAO_3V3 VDDAO_3V3_POR VDDCPU_A VDDCPU_A_PWM VDDCPU_B VDDCPU_B_EN VDDCPU_B_PWM VDDDDR_PWM VDDEE_MODE VDDEE_PWM VDDGPU_MODE VDDGPU_PWM VDDIO_1V8 VDDIO_3V3 VDDIO_BOOT VDDIO_H VDDIO_LX VDDIO_M VDDIO_X VDDIO_Z VDDIOC_SW VDDNPU_PWM VDDQ_1V1 VDDQ_VDDQLP_EN VDDQLP_0V6_1V1 VDDQLP¨_0V6_1V1 VDQLP_0V6_1V1 VVDDAO_3V3_POR
net class POWER_SIGNALS: PWR_EN PWR_HOLD PWR_HOLD_EXT SDPWR_EN
net class PERIPHERICS_SIGNALS: ADC_CH3 ADC_CH6 ADC_KEY AVDD0V8_CSI AVDD08_DP AVDD18_DP ENET_EXTRES EVCC3V3 FAN_PWM GND GPIOD_5/IR_IN GPIOD_7 GPIOH_0 GPIOT_18 HOST_WAKE_BT HW_ID I2CM_AO_SCL I2CM_AO_SDA LCD_BL_PWM LCD_EN LCD_RESET
net class MIPI_HIGH_SPEED: MIPI_DSI_CLKN MIPI_DSI_CLKP MIPI_DSI_D0N MIPI_DSI_D0P MIPI_DSI_D1N MIPI_DSI_D1P MIPI_DSI_D2N MIPI_DSI_D2P MIPI_DSI_D3N MIPI_DSI_D3P
net class MCU_SIGNAL: MCU_BOOT_CTRL MCU_I2C2_SCL MCU_I2C2_SDA MCU_NMI MCU_PA0 MCU_PA15 MCU_PWR_CTRL MCU_PWR_KEY MCU_RST MCU_RST_CTRL MCU_SWCLK MCU_SWDIO MCU_USART2_RX MCU_USART2_TX
net class I2S_PROTOCOL: I2S_LRCLK1 I2S_MCLK1 I2S_SCLK1 I2S_SDI1 I2S_SDO1
net class EMMC_HIGH_SPEED: BOOT_CLK BOOT_CMD BOOT_D0 BOOT_D1 BOOT_D2 BOOT_D3 BOOT_D4 BOOT_D5 BOOT_D6 BOOT_D7 BOOT_DCLK BOOT_DQS BOOT_GPIOB_9 BOOT_GPIOB_12 BOOT_RST_N
net class DDR1_HIGH_SPEED: DDR1_CAA0 DDR1_CAA1 DDR1_CAA2 DDR1_CAA3 DDR1_CAA4 DDR1_CAA5 DDR1_CAB0 DDR1_CAB1 DDR1_CAB2 DDR1_CAB3 DDR1_CAB4 DDR1_CAB5 DDR1_CKEA0 DDR1_CKEA1 DDR1_CKEB0 DDR1_CKEB1 DDR1_CLKA_C DDR1_CLKA_T DDR1_CLKB_C DDR1_CLKB_T DDR1_CSA0 DDR1_CSA1 DDR1_CSB0 DDR1_CSB1 DDR1_DQ0 DDR1_DQ1 DDR1_DQ2 DDR1_DQ3 DDR1_DQ4 DDR1_DQ5 DDR1_DQ6 DDR1_DQ7 DDR1_DQ8 DDR1_DQ9 DDR1_DQ10 DDR1_DQ11 DDR1_DQ12 DDR1_DQ13 DDR1_DQ14 DDR1_DQ15 DDR1_DQ16 DDR1_DQ17 DDR1_DQ18 DDR1_DQ19 DDR1_DQ20 DDR1_DQ21 DDR1_DQ22 DDR1_DQ23 DDR1_DQ24 DDR1_DQ25 DDR1_DQ26 DDR1_DQ27 DDR1_DQ28 DDR1_DQ29 DDR1_DQ30 DDR1_DQ31 DDR1_DQM0 DDR1_DQM1 DDR1_DQM2 DDR1_DQM3 DDR1_DQSN0 DDR1_DQSN1 DDR1_DQSN2 DDR1_DQSN3 DDR1_DQSP0 DDR1_DQSP1 DDR1_DQSP2 DDR1_DQSP3 DDR1_PVREF DDR1_PZQ DDR1_RST DDR_ID
net class CSI_HIGH_SPEED: CSI_A_CLKN CSI_A_CLKP CSI_A_D0N CSI_A_D0P CSI_A_D1N CSI_A_D1P CSI_A_D2N CSI_A_D2P CSI_A_D3N CSI_A_D3P CSI_B_CLKN CSI_B_CLKP
net class CPU_SIGNAL: CMA_I2CM_C_SCL CMA_I2CM_C_SDA CMA_MCLK CMA_PWR CMA_PWRDN CMA_RST_L CPU_RESET CPU_RST_INT CPUA_MODE CPUB_MODE EMMC_EN
net class ANTENAS: ANT0 ANT1
differential pair D_MIPI_DSI_D3: +MIPI_DSI_D3P -MIPI_DSI_D3N
differential pair D_MIPI_DSI_D2: +MIPI_DSI_D2P -MIPI_DSI_D2N
differential pair D_MIPI_DSI_D1: +MIPI_DSI_D1P -MIPI_DSI_D1N
differential pair D_MIPI_DSI_D0: +MIPI_DSI_D0P -MIPI_DSI_D0N
differential pair D_MIPI_DSI_CLK: +MIPI_DSI_CLKP -MIPI_DSI_CLKN
differential pair D_DDR1_DQS3: +DDR1_DQSP3 -DDR1_DQSN3
differential pair D_DDR1_DQS2: +DDR1_DQSP2 -DDR1_DQSN2
differential pair D_DDR1_DQS1: +DDR1_DQSP1 -DDR1_DQSN1
differential pair D_DDR1_DQS0: +DDR1_DQSP0 -DDR1_DQSN0
differential pair D_CSI_B_CLK: +CSI_B_CLKP -CSI_B_CLKN
differential pair D_CSI_A_D3: +CSI_A_D3P -CSI_A_D3N
differential pair D_CSI_A_D2: +CSI_A_D2P -CSI_A_D2N
differential pair D_CSI_A_D1: +CSI_A_D1P -CSI_A_D1N
differential pair D_CSI_A_D0: +CSI_A_D0P -CSI_A_D0N
differential pair D_CSI_A_CLK: +CSI_A_CLKP -CSI_A_CLKN

## Components (designator, comment, footprint, x,y, rotation, side; value= is the part's Value field where it differs from the comment)
* "FUSB302BMPX" FUSB302BMPX-Footprint-1 16.441,42.349 r180 top
B1 "W25Q256JVEIQ" SON127P800X600X80-9N-D 62.441,26.349 r180 top
B2 "AP6275S" AP6275S 114.691,41.161 r0 top
C1 "Capacitor 100nF +/-20% 50V 0402" CAPC0402(1005)60_L 72.441,44.899 r270 bottom value=100nF
C2 "Capacitor 1nF +/-20% 50V 0402" CAPC0402(1005)33_L 55.441,47.799 r270 bottom value=1nF
C3 "CC0201KRX5R6BB472" FP-CC0201-BA-IPC_A 49.087,47.349 r180 bottom value=4.7nF
C4 "0201ZD105MAT2A" CAPC0603X33X15LL03T05 88.721,34.349 r180 bottom value=1µF
C5 "Capacitor 100nF +/-20% 10V 0402" CAPC0402(1005)60_L 102.991,36.349 r180 bottom value=100nF
C6 "GRM0335C1H100FA01D" FP-GRM033-0_03-MFG 42.441,44.587 r270 bottom value=10pF
C7 "Capacitor 1µF +/-20% 10V 0402" CAPC0402(1005)60_L 30.991,40.349 r180 bottom value=1µF
C8 "Capacitor 1µF +/-20% 10V 0402" CAPC0402(1005)60_L 33.991,37.349 r180 bottom value=1µF
C9 "C0201C150J3GACTU" FP-C0201-AB-IPC_A 33.087,44.349 r180 bottom value=15pF
C10 "CC0201MRX5R6BB225" FP-CC0201-BA-IPC_A 40.441,41.704 r90 bottom value=2.2µF
C11 "GRM035R60J475ME15J" FP-GRM035-0_09-IPC_B 44.441,47.349 r180 bottom value=4.7µF
C12 "GRM035R60J475ME15J" FP-GRM035-0_09-IPC_B 91.441,40.349 r90 bottom value=4.7µF
C13 "Capacitor 100nF +/-20% 10V 0402" CAPC0402(1005)60_L 104.441,39.899 r90 bottom value=100nF
C14 "GRM0335C1H120FA01D" FP-GRM033-0_03-MFG 33.441,29.349 r90 bottom value=12pF
C15 "GRM0335C1H120FA01D" FP-GRM033-0_03-MFG 45.597,29.28 r90 bottom value=12pF
C16 "GRM155R60G106ME47D" FP-GRM155-0_2-0_1-IPC_C 37.506,39.661 r90 bottom value=10µF
C17 "0201ZD105MAT2A" CAPC0603X33X15LL03T05 46.584,33.28 r90 bottom value=1µF
C18 "0201ZD105MAT2A" CAPC0603X33X15LL03T05 40.996,33.28 r90 bottom value=1µF
C19 "CC0201KRX5R7BB104" FP-CC0201-BA-IPC_A 34.441,41.704 r90 bottom value=100nF
C20 "CC0201KRX5R7BB104" FP-CC0201-BA-IPC_A 45.796,44.349 r0 bottom value=100nF
C21 "JMK105BBJ475MVHF" FP-0402-L_1_0_0_15-W_0_5-IPC_B 42.713,39.534 r180 bottom value=4.7µF
C22 "JMK105BBJ475MVHF" FP-0402-L_1_0_0_15-W_0_5-IPC_B 51.918,33.788 r90 bottom value=4.7µF
C23 "CC0201KRX5R7BB104" FP-CC0201-BA-IPC_A 61.441,48.704 r90 bottom value=100nF
C24 "GRM186R60J226ME15D" FP-GRM186-0_2-IPC_A 100.441,50.349 r0 top value=22µF
C25 "GRM186R60J226ME15D" FP-GRM186-0_2-IPC_A 82.212,61.862 r0 top value=22µF
C26 "GRM155R60G106ME47D" FP-GRM155-0_2-0_1-IPC_C 93.441,33.96 r90 top value=10µF
C27 "CC0201KRX5R7BB104" FP-CC0201-BA-IPC_A 98.441,31.995 r90 top value=100nF
C28 "CC0201KRX5R7BB104" FP-CC0201-BA-IPC_A 103.441,45.995 r90 top value=100nF
C29 "CC0201KRX5R7BB104" FP-CC0201-BA-IPC_A 105.441,50.995 r90 top value=100nF
C30 "CC0201KRX5R7BB104" FP-CC0201-BA-IPC_A 41.441,26.995 r90 top value=100nF
C31 "CC0201KRX5R7BB104" FP-CC0201-BA-IPC_A 63.087,39.349 r180 bottom value=100nF
C32 "0201ZD105MAT2A" CAPC0603X33X15LL03T05 124.441,63.349 r90 top value=1µF
C33 "0201ZD105MAT2A" CAPC0603X33X15LL03T05 133.441,68.349 r0 top value=1µF
C34 "GRM155R60G106ME47D" FP-GRM155-0_2-0_1-IPC_C 120.708,68.608 r90 top value=10µF
C35 "GRM155R60G106ME47D" FP-GRM155-0_2-0_1-IPC_C 121.441,55.738 r90 top value=10µF
C36 "JMK105BBJ475MVHF" FP-0402-L_1_0_0_15-W_0_5-IPC_B 100.441,67.898 r90 top value=4.7µF
C37 "0201ZD105MAT2A" CAPC0603X33X15LL03T05 124.441,59.349 r90 top value=1µF
C38 "CC0201KRX5R7BB104" FP-CC0201-BA-IPC_A 131.918,62.318 r0 top value=100nF
C39 "CC0201KRX5R7BB104" FP-CC0201-BA-IPC_A 127.796,57.349 r0 top value=100nF
C40 "CC0201KRX5R7BB104" FP-CC0201-BA-IPC_A 110.441,55.704 r90 top value=100nF
C41 "GRM186R60J226ME15D" FP-GRM186-0_2-IPC_A 77.441,60.349 r270 top value=22µF
C42 "GRM155R60G106ME47D" FP-GRM155-0_2-0_1-IPC_C 99.441,54.96 r90 top value=10µF
C43 "JMK105BBJ475MVHF" FP-0402-L_1_0_0_15-W_0_5-IPC_B 56.441,39.898 r90 top value=4.7µF
C44 "0201ZD105MAT2A" CAPC0603X33X15LL03T05 107.441,59.184 r90 top value=1µF
C45 "0201ZD105MAT2A" CAPC0603X33X15LL03T05 113.283,59.184 r90 top value=1µF
C46 "0201ZD105MAT2A" CAPC0603X33X15LL03T05 117.735,56.306 r90 top value=1µF
C47 "CC0201KRX5R7BB104" FP-CC0201-BA-IPC_A 66.441,52.704 r90 top value=100nF
C48 "CC0201KRX5R7BB104" FP-CC0201-BA-IPC_A 52.441,29.995 r90 top value=100nF
C49 "CC0201KRX5R7BB104" FP-CC0201-BA-IPC_A 72.441,17.995 r90 top value=100nF
C50 "CC0201KRX5R7BB104" FP-CC0201-BA-IPC_A 56.441,23.995 r270 top value=100nF
C51 "CC0201KRX5R7BB104" FP-CC0201-BA-IPC_A 71.441,28.995 r90 top value=100nF
C52 "CC0201KRX5R7BB104" FP-CC0201-BA-IPC_A 56.441,35.995 r90 top value=100nF
C53 "CC0201KRX5R7BB104" FP-CC0201-BA-IPC_A 63.796,60.349 r0 top value=100nF
C54 "CC0201KRX5R7BB104" FP-CC0201-BA-IPC_A 57.441,47.995 r90 bottom value=100nF
C55 "GRM186R60J226ME15D" FP-GRM186-0_2-IPC_A 117.441,60.175 r270 top value=22µF
C56 "GRM186R60J226ME15D" FP-GRM186-0_2-IPC_A 71.441,56.175 r90 top value=22µF
C57 "GRM155R60G106ME47D" FP-GRM155-0_2-0_1-IPC_C 43.441,30.738 r90 top value=10µF
C58 "CC0201KRX5R7BB104" FP-CC0201-BA-IPC_A 50.441,52.704 r90 top value=100nF
C59 "CC0201KRX5R7BB104" FP-CC0201-BA-IPC_A 68.441,31.995 r90 bottom value=100nF
C60 "CC0201KRX5R7BB104" FP-CC0201-BA-IPC_A 54.441,52.995 r90 top value=100nF
C61 "CC0201KRX5R7BB104" FP-CC0201-BA-IPC_A 33.441,34.704 r90 bottom value=100nF
C62 "CC0201KRX5R7BB104" FP-CC0201-BA-IPC_A 60.441,51.995 r90 top value=100nF
C63 "GRM186R60J226ME15D" FP-GRM186-0_2-IPC_A 68.616,45.349 r0 bottom value=22µF
C64 "GRM186R60J226ME15D" FP-GRM186-0_2-IPC_A 64.267,42.349 r180 bottom value=22µF
C65 "GRM155R60G106ME47D" FP-GRM155-0_2-0_1-IPC_C 65.83,39.349 r180 bottom value=10µF
C66 "CC0201KRX5R7BB104" FP-CC0201-BA-IPC_A 69.796,42.349 r180 bottom value=100nF
C67 "CC0201KRX5R7BB104" FP-CC0201-BA-IPC_A 59.796,40.349 r180 bottom value=100nF
C68 "CC0201KRX5R7BB104" FP-CC0201-BA-IPC_A 66.796,37.349 r180 bottom value=100nF
C69 "CC0201KRX5R7BB104" FP-CC0201-BA-IPC_A 61.796,37.349 r180 bottom value=100nF
C70 "CC0201KRX5R7BB104" FP-CC0201-BA-IPC_A 65.087,34.349 r180 bottom value=100nF
C71 "GRM186R60J226ME15D" FP-GRM186-0_2-IPC_A 115.441,28.524 r270 top value=22µF
C72 "GRM186R60J226ME15D" FP-GRM186-0_2-IPC_A 87.616,52.349 r0 top value=22µF
C73 "GRM155R60G106ME47D" FP-GRM155-0_2-0_1-IPC_C 84.441,28.96 r90 top value=10µF
C74 "CC0201KRX5R7BB104" FP-CC0201-BA-IPC_A 89.441,29.704 r90 top value=100nF
C75 "CC0201KRX5R7BB104" FP-CC0201-BA-IPC_A 95.441,28.704 r90 top value=100nF
C76 "CC0201KRX5R7BB104" FP-CC0201-BA-IPC_A 97.441,36.704 r90 top value=100nF
C77 "CC0201KRX5R7BB104" FP-CC0201-BA-IPC_A 87.087,39.349 r180 bottom value=100nF
C78 "CC0201KRX5R7BB104" FP-CC0201-BA-IPC_A 89.441,38.704 r90 bottom value=100nF
C79 "CC0201KRX5R7BB104" FP-CC0201-BA-IPC_A 58.441,35.995 r90 bottom value=100nF
C80 "0201ZD105MAT2A" CAPC0603X33X15LL03T05 82.441,40.349 r90 bottom value=1µF
C81 "GRM186R60J226ME15D" FP-GRM186-0_2-IPC_A 96.441,47.349 r0 top value=22µF
C82 "GRM186R60J226ME15D" FP-GRM186-0_2-IPC_A 80.616,52.349 r0 top value=22µF
C83 "GRM155R60G106ME47D" FP-GRM155-0_2-0_1-IPC_C 83.052,43.349 r180 bottom value=10µF
C84 "CC0201KRX5R7BB104" FP-CC0201-BA-IPC_A 87.441,44.704 r90 bottom value=100nF
C85 "CC0201KRX5R7BB104" FP-CC0201-BA-IPC_A 84.441,44.704 r90 bottom value=100nF
C86 "CC0201KRX5R7BB104" FP-CC0201-BA-IPC_A 80.441,44.704 r90 bottom value=100nF
C87 "CC0201KRX5R7BB104" FP-CC0201-BA-IPC_A 79.087,42.349 r180 bottom value=100nF
C88 "CC0201KRX5R7BB104" FP-CC0201-BA-IPC_A 80.441,40.349 r90 bottom value=100nF
C89 "GRM186R60J226ME15D" FP-GRM186-0_2-IPC_A 45.441,51.349 r0 top value=22µF
C90 "GRM186R60J226ME15D" FP-GRM186-0_2-IPC_A 48.267,29.349 r180 top value=22µF
C91 "GRM155R60G106ME47D" FP-GRM155-0_2-0_1-IPC_C 63.318,55.618 r0 top value=10µF
C92 "CC0201KRX5R7BB104" FP-CC0201-BA-IPC_A 68.525,55.745 r90 top value=100nF
C93 "CC0201KRX5R7BB104" FP-CC0201-BA-IPC_A 74.367,55.745 r90 top value=100nF
C94 "CC0201KRX5R7BB104" FP-CC0201-BA-IPC_A 76.441,50.704 r90 top value=100nF
C95 "CC0201KRX5R7BB104" FP-CC0201-BA-IPC_A 84.441,49.704 r90 top value=100nF
C96 "CC0201KRX5R7BB104" FP-CC0201-BA-IPC_A 92.441,47.995 r90 top value=100nF
C97 "GRM186R60J226ME15D" FP-GRM186-0_2-IPC_A 75.441,27.349 r0 top value=22µF
C98 "GRM186R60J226ME15D" FP-GRM186-0_2-IPC_A 75.441,43.175 r90 top value=22µF
C99 "GRM155R60G106ME47D" FP-GRM155-0_2-0_1-IPC_C 63.83,46.349 r180 bottom value=10µF
C100 "CC0201KRX5R7BB104" FP-CC0201-BA-IPC_A 87.087,36.349 r180 bottom value=100nF
C101 "CC0201KRX5R7BB104" FP-CC0201-BA-IPC_A 84.087,36.349 r180 bottom value=100nF
C102 "CC0201KRX5R7BB104" FP-CC0201-BA-IPC_A 79.796,38.349 r180 bottom value=100nF
C103 "CC0201KRX5R7BB104" FP-CC0201-BA-IPC_A 84.441,38.995 r90 bottom value=100nF
C104 "CC0201KRX5R7BB104" FP-CC0201-BA-IPC_A 80.796,36.349 r180 bottom value=100nF
C105 "GRM186R60J226ME15D" FP-GRM186-0_2-IPC_A 70.441,24.524 r270 top value=22µF
C106 "GRM186R60J226ME15D" FP-GRM186-0_2-IPC_A 80.441,29.349 r180 top value=22µF
C107 "GRM155R60G106ME47D" FP-GRM155-0_2-0_1-IPC_C 92.441,29.96 r90 top value=10µF
C108 "CC0201KRX5R7BB104" FP-CC0201-BA-IPC_A 75.796,33.349 r180 bottom value=100nF
C109 "CC0201KRX5R7BB104" FP-CC0201-BA-IPC_A 70.796,32.349 r180 bottom value=100nF
C110 "CC0201KRX5R7BB104" FP-CC0201-BA-IPC_A 73.087,36.349 r180 bottom value=100nF
C111 "CC0201KRX5R7BB104" FP-CC0201-BA-IPC_A 75.441,38.995 r270 bottom value=100nF
C112 "CC0201KRX5R7BB104" FP-CC0201-BA-IPC_A 84.087,32.349 r0 bottom value=100nF
C113 "GRM186R60J226ME15D" FP-GRM186-0_2-IPC_A 87.441,26.175 r90 top value=22µF
C114 "GRM186R60J226ME15D" FP-GRM186-0_2-IPC_A 65.441,20.524 r270 top value=22µF
C115 "GRM155R60G106ME47D" FP-GRM155-0_2-0_1-IPC_C 88.441,41.738 r270 bottom value=10µF
C116 "CC0201KRX5R7BB104" FP-CC0201-BA-IPC_A 85.796,47.349 r180 bottom value=100nF
C117 "CC0201KRX5R7BB104" FP-CC0201-BA-IPC_A 85.087,41.349 r180 bottom value=100nF
C118 "CC0201KRX5R7BB104" FP-CC0201-BA-IPC_A 82.087,46.349 r180 bottom value=100nF
C119 "CC0201KRX5R7BB104" FP-CC0201-BA-IPC_A 80.796,34.349 r180 bottom value=100nF
C120 "CC0201KRX5R7BB104" FP-CC0201-BA-IPC_A 60.087,46.349 r180 bottom value=100nF
C121 "CC0201MRX5R6BB225" FP-CC0201-BA-IPC_A 42.796,36.349 r180 bottom value=2.2µF
C122 "CC0201KRX5R7BB104" FP-CC0201-BA-IPC_A 121.589,45.016 r90 bottom value=100nF
C123 "CC0201KRX5R7BB104" FP-CC0201-BA-IPC_A 22.796,30.349 r180 bottom value=100nF